# EAGLE board XDrip LiPo Board (EAGLE 7.5.0)
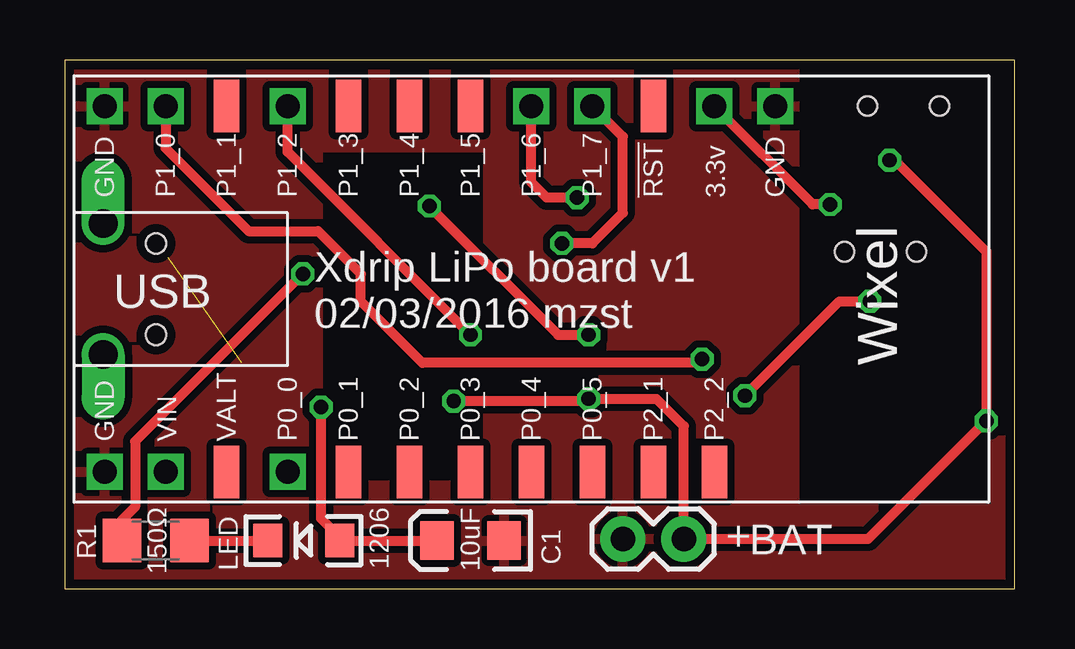
[diagram p0: board, top side]
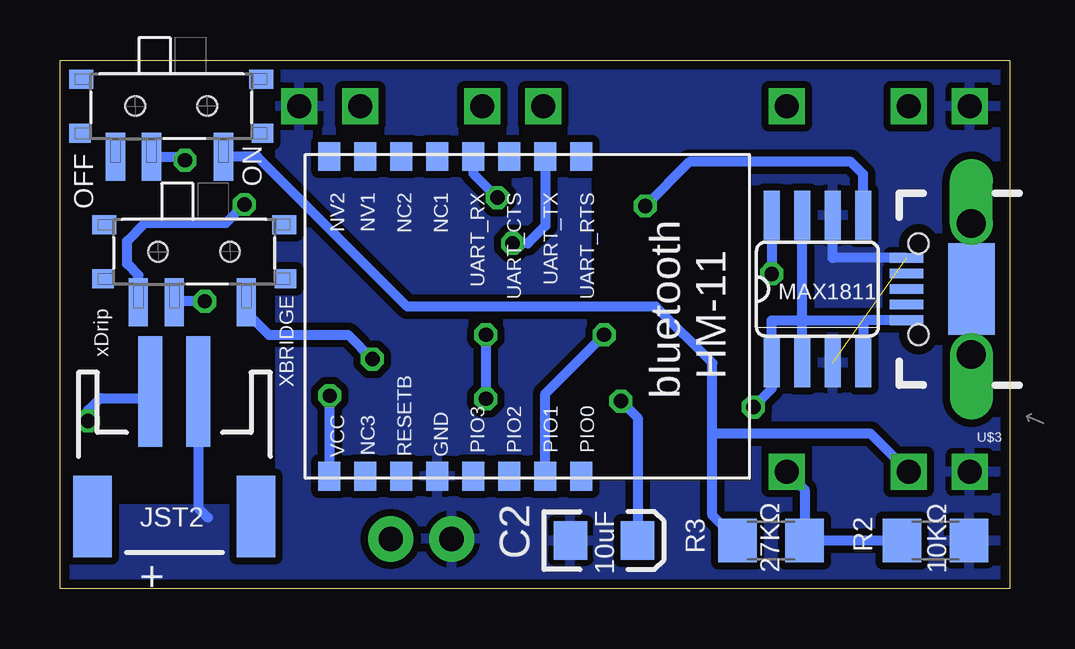
[diagram p1: board, bottom side, seen from below]

Size 39.58 x 22.02 mm. Coordinates in mm from the lower left corner, seen from the top.
Outline: 39.58,0 39.58,22.02 0,22.02 0,0 39.58,0
Copper layers (1*16): Top 0.0356mm / dielectric 1.5011mm / Bottom 0.0356mm
Design rules "oshpark-2layer *": minimum track width 6mil, minimum drill 13mil, track to track 6mil, track to pad 6mil, pad to pad 6mil, via to via 6mil, smd to smd 6mil, copper to edge 15mil, drill to drill 6mil, minimum pad ring 7mil, minimum via ring 7mil, stop-mask expansion 2.5mil, vias tented up to drill 25mil, thermal gap 10mil

## Footprints (pad centres in the part's own frame; a part is rotated, then mirrored left to right if it is on the bottom)
1X02 = drill 1.016 pad 1.88: 1 0,0; 2 2.54,0
EIA3216 = smd 1.4 x 1.6: A 1.4,0; C -1.4,0
JST-2-SMD = smd 1 x 4.6: 1 -1,-3.7; 2 1,-3.7 | smd 1.6 x 3.4: NC1 -3.4,1.5; NC2 3.4,1.5
LED-1206 = smd 1.2 x 1.4: A -1.5,0; C 1.5,0
SO08 = smd 0.66 x 2.032: 1 -1.905,-3.073; 2 -0.635,-3.073; 3 0.635,-3.073; 4 1.905,-3.073; 5 1.905,3.073; 6 0.635,3.073; 7 -0.635,3.073; 8 -1.905,3.073
MSK-12C02 = smd 0.8 x 2: COM 0.823,2.1; L1 2.323,2.1; L2 -2.177,2.1 | smd 1 x 0.8: GND@1 -3.75,-1.125; GND@4 3.75,-1.125 | smd 0.9 x 0.8: GND@2 -3.8,1.125; GND@3 3.8,1.125 | hole 0.8: -1.5,0; 1.5,0
1206 = smd 1.6 x 1.8: 1 -1.4,0; 2 1.4,0
HM-11 = smd 1.2 x 0.9: GND 7.508,-0.6; NC1 -5.808,-0.6; NC2 -5.808,-2.1; NC3 7.508,-3.6; NV1 -5.808,-3.6; NV2 -5.808,-5.1; PIO0 7.508,5.4; PIO1 7.508,3.9; PIO2 7.508,2.4; PIO3 7.508,0.9; RESETB 7.508,-2.1; UART_CTS -5.808,2.4; UART_RTS -5.808,5.4; UART_RX -5.808,0.9; UART_TX -5.808,3.9; VCC 7.508,-5.1
USB-AB-MICRO-SMD_V02_BOSS = smd 1.4 x 0.4: D+ 2.7,0; D- 2.7,0.65; GND 2.7,-1.3; ID 2.7,-0.65; VCC 2.7,1.3 | drill 1.2 pad 1.676 offset: P$1 0,2.731; P$2 0,-2.731 | smd 1.93 x 3.81: P$4 0,0 | hole 0.85: 2.2,1.9; 2.2,-1.9
WIXEL = drill 1 square: P$1 -7.62,17.78; P$2 -7.62,15.24; P$4 -7.62,10.16; P$12 7.62,17.78; P$13 7.62,15.24; P$15 7.62,10.16; P$19 7.62,0; P$20 7.62,-2.54 | smd 2.184 x 1.067: P$3 -7.62,12.7; P$5 -7.62,7.62; P$6 -7.62,5.08; P$7 -7.62,2.54; P$8 -7.62,0; P$9 -7.62,-2.54; P$10 -7.62,-5.08; P$11 -7.62,-7.62; P$14 7.62,12.7; P$16 7.62,7.62; P$17 7.62,5.08; P$18 7.62,2.54; P$21 7.62,-5.08 | drill 1 pad 1.422 square: P$22 7.62,-7.62; P$23 7.62,-10.16

## Placement (x,y rotation side)
BAT  +  [1X02]  25.8,2.06 180 top
C1  10uF  [EIA3216]  16.91,2 180 top
C2  10uF  [EIA3216]  16.91,2 0 bottom
JST2  +  [JST-2-SMD]  34.82,4.51 180 bottom
LED  1206  [LED-1206]  9.96,2 180 top
MAX1811  [SO08]  8.02,12.48 0 bottom
ON  OFF  [MSK-12C02]  34.95,20.1 180 bottom
R1  150Ω  [1206]  3.8,2 0 top
R2  10KΩ  [1206]  3.1,2 180 bottom
R3  27KΩ  [1206]  9.96,2 180 bottom
U$2  HM-11  [HM-11]  23.26,12.19 270 bottom
U$3  MICRO-USB-B  [USB-AB-MICRO-SMD_V02_BOSS]  1.61,12.48 180 bottom
W1  Wixel  [WIXEL]  19.45,12.48 90 top
XBRIDGE  xDrip  [MSK-12C02]  33.99,14.03 180 bottom

## Library data of the parts
BAT = SparkFun-Connectors
C1 C2 = SparkFunEagle-6-6-07
JST2 = SparkFun-Connectors; PROD_ID: CONN-11443
LED = SparkFun-LED; PROD_ID: DIO-09955
MAX1811 = max1811
ON XBRIDGE = MSK-12C02 SMD Micro Slider Switch SPDT
R1-R3 = SparkFun-Resistors
U$2 = HM-11
U$3 = micro usb B - sparkfun - china - hole
W1 = wixel

## Nets
BAT: BAT.1 C2.A JST2.2 MAX1811.5 ON.COM
GND: BAT.2 C1.C C2.C JST2.1 MAX1811.3 MAX1811.6 R2.1 U$2.GND U$3.GND W1.P$1 W1.P$12 W1.P$23
N$1: U$2.VCC XBRIDGE.COM
N$2: LED.C R1.2
N$3: MAX1811.8 R1.1
N$4: ON.L2 R3.2 W1.P$2
N$5: R2.2 R3.1 W1.P$4
N$6: W1.P$13 XBRIDGE.L2
N$7: U$2.PIO1 W1.P$15
N$8: W1.P$22 XBRIDGE.L1
RX: U$2.UART_RX W1.P$19
TX: U$2.UART_TX W1.P$20
VIN: C1.A LED.A MAX1811.1 MAX1811.2 MAX1811.4 MAX1811.7 U$3.VCC

## Tracks (layer width: path | path; a pad name or v marks a point on that pad's centre or on a via)
BAT  (via drill 0.6)
  Top 0.406: v15.2,15.94 20.56,10.57 v21.83,10.57 | v16.21,7.81 21.74,7.81 v21.83,7.91 24.66,7.91 25.8,6.76 BAT.1 33.49,2.06 v38.41,6.98 38.41,14.03 34.6,17.84 v34.37,17.84
  Bottom 0.406: JST2.2 36.09,7.94 37.9,7.94 38.41,7.43 v38.41,6.98 | MAX1811.5 6.12,17.27 6.63,17.78 13.36,17.78 v15.2,15.94 | v16.21,7.81 15.51,7.11 C2.A | v21.83,10.57 v21.83,7.91 | ON.COM 34.53,18 v34.37,17.84
GND  (1 unrouted)
  Bottom 0.406: JST2.1 33.82,3.35 33.42,2.95 | U$3.GND 7.39,13.78 MAX1811.6
  pour Top (isolate 0.305): -2.14,-2.76 -2.14,25.18 42.31,25.18 42.31,-2.76
  pour Bottom (isolate 0.305): -4.68,27.72 -4.68,-5.3 44.85,-5.3 44.85,27.72
N$1  (via drill 0.6)
  Top 0.406: v28.34,8.03 32.28,11.97 v33.55,11.97
  Bottom 0.406: U$2.VCC 28.34,4.7 v28.34,8.03 | v33.55,11.97 34.91,11.97 arc-90 XBRIDGE.COM
N$2
  Top 0.406: R1.2 LED.C
N$3  (via drill 0.6)
  Top 0.305: 2.4,2.86 R1.1
  Top 0.406: v9.93,13.11 2.94,6.13 2.94,3.4 2.4,2.86
  Bottom 0.406: MAX1811.8 v9.93,13.11
N$4
  Bottom 0.406: 12.4,6.45 12.4,9.4 14.75,11.75 25.1,11.75 31.35,18 ON.L2 | W1.P$2 5.8,6.45 12.4,6.45 | R3.2 12.4,3.04 12.4,6.45
N$5
  Bottom 0.406: R2.2 R3.1 8.56,4.12 W1.P$4
N$6  (via drill 0.6)
  Top 0.406: W1.P$13 4.21,18.35 7.67,14.89 10.56,14.89 12.34,13.11 12.34,11.97 14.91,9.4 26.41,9.4 v26.56,9.56
  Bottom 0.406: v26.56,9.56 27.58,10.57 30.88,10.57 31.94,11.63 XBRIDGE.L2
N$7  (via drill 0.6)
  Top 0.406: v16.91,10.57 9.29,18.19 W1.P$15
  Bottom 0.406: U$2.PIO1 19.36,8.12 v16.91,10.57
N$8  (via drill 0.6)
  Top 0.406: v31.9,16 31.17,16 W1.P$22
  Bottom 0.406: v31.9,16 32.66,15.24 36.03,15.24 36.79,14.48 36.79,13.53 36.32,13.05 XBRIDGE.L1
N$9
  cutout Top: 17.42,18.16 10.79,18.16 10.79,4.51 17.42,4.51
  cutout Bottom: 10.79,18.16 17.42,18.16 17.42,4.51 10.79,4.51
N$10
  cutout Top: 30.63,21.43 38.57,21.43 38.57,3.52 30.63,3.52
N$11
  cutout Bottom: 30.63,21.43 38.57,21.43 38.57,3.52 30.63,3.52
RX  (via drill 0.6)
  Top 0.406: v21.36,16.29 20.09,16.29 19.45,16.92 W1.P$19
  Bottom 0.406: U$2.UART_RX 22.36,17.29 v21.36,16.29
TX  (via drill 0.6)
  Top 0.406: W1.P$20 23.26,18.83 23.26,15.65 21.99,14.38 v20.72,14.38
  Bottom 0.406: U$2.UART_TX 19.36,15.11 20.09,14.38 v20.72,14.38
VIN  (via drill 0.6)
  Top 0.305: 11.46,2.14 LED.A
  Top 0.406: LED.A C1.A | 11.46,2.14 10.69,2.91 v10.69,7.56
  Bottom 0.406: 6.12,11.18 MAX1811.4 | MAX1811.2 8.66,11.18 | 8.66,11.18 6.12,11.18 | 8.66,11.18 9.93,11.18 MAX1811.1 9.93,8.32 v10.69,7.56 | 8.66,11.18 MAX1811.7 | U$3.VCC 6.12,11.18

## Text on the board
tNames: Xdrip LiPo board v1 / 02/03/2016 mzst